# Altium PCB Power Distribution Board.PcbDoc
Units mil, origin at the board's own origin, x right, y up, seen from the top; angles counter-clockwise.
Board outline 3000 x 2000 mil, 2 copper layers (Top Layer, Bottom Layer); 28 components, 15 nets, 78 pads, 13 vias.
Unrouted connection lines stored in the file: 1.
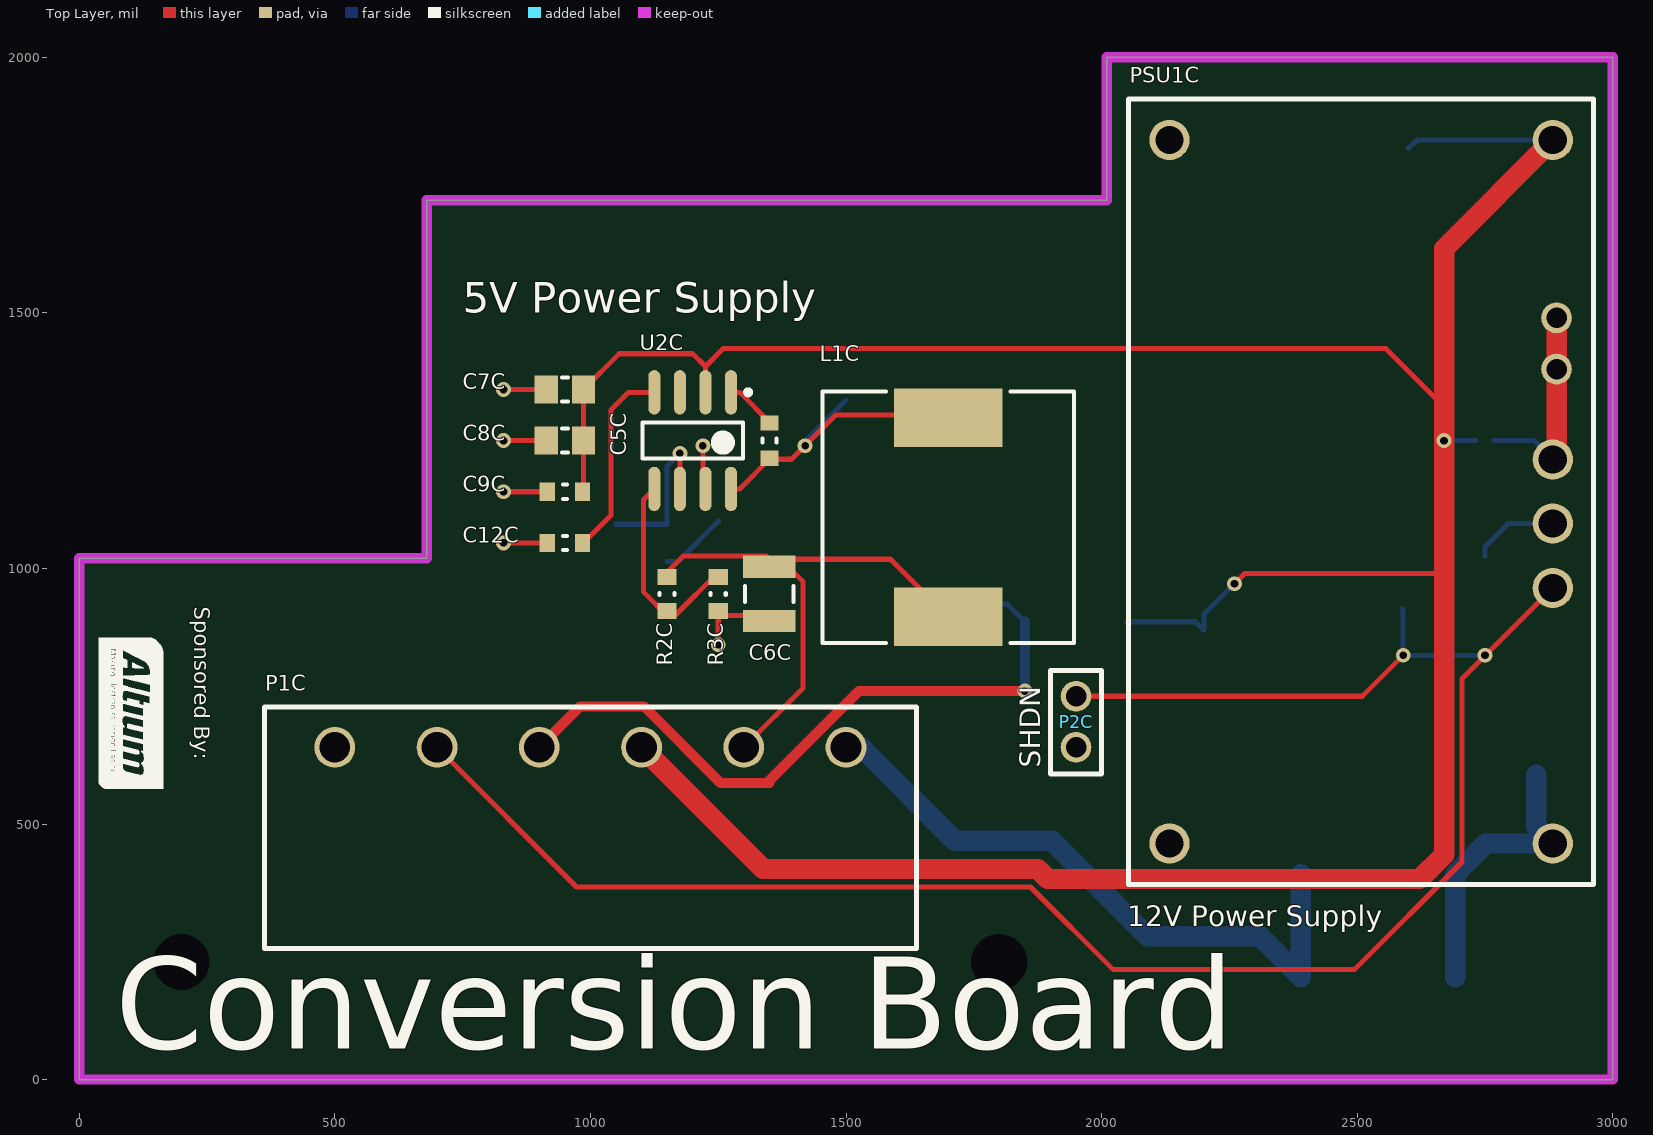
[diagram p0: Top Layer view]
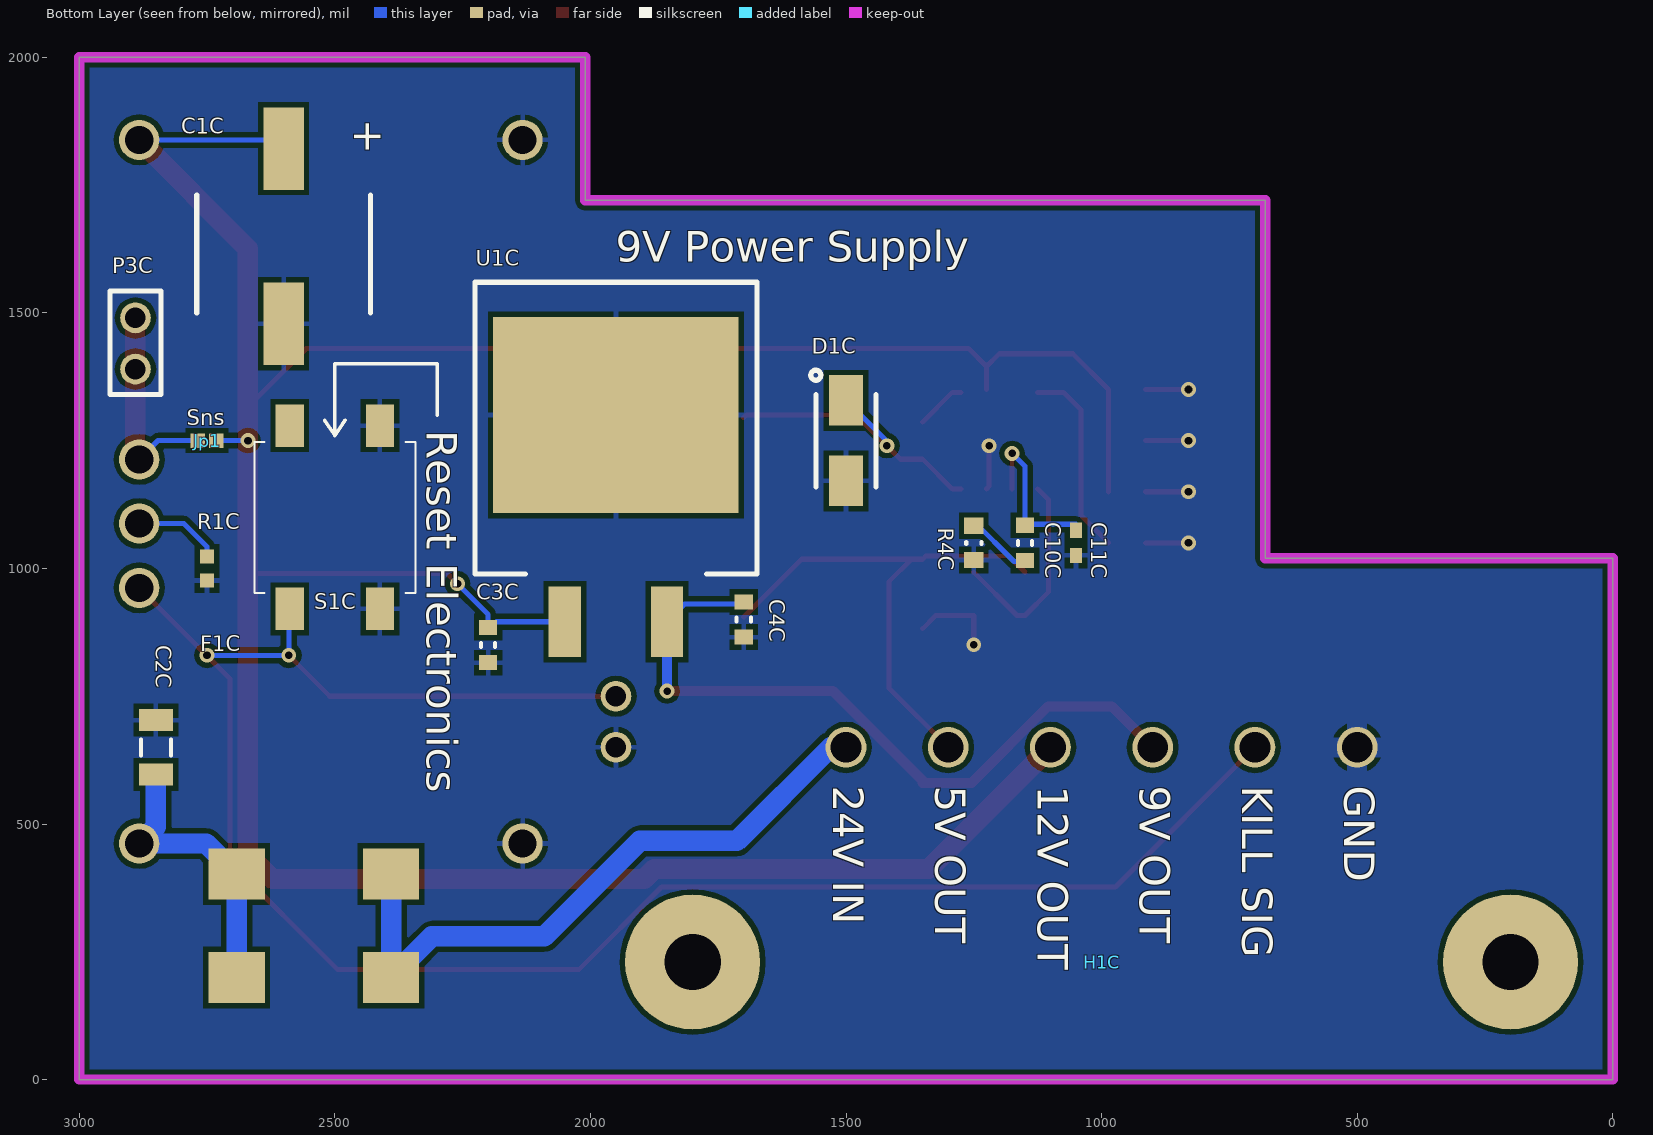
[diagram p1: Bottom Layer view, seen from below]

## Layer stack, top to bottom
Top Solder: solder mask 0.4, Solder Resist, Dk 3.5
Top Layer: signal copper 1.4
Dielectric 1: dielectric 12.6, FR-4, Dk 4.8
Bottom Layer: signal copper 1.4
Bottom Solder: solder mask 0.4, Solder Resist, Dk 3.5

## Board outline
0,0 3000,0 3000,2000 2010,2000 2010,1720 680,1720 680,1020 0,1020

## Design rules (kind name [scope] priority, off if disabled: settings)
Clearance "Ignore Jumper Clearance 1" [InComponent('Jp1')] p1: gap=10 ignorepadtopadclearanceinfootprint=FALSE except(0: Arc-Hole Track-Hole SMDPad-Hole THPad-Hole Via-Hole Fill-Hole Poly-Hole Region-Hole Text-Hole; 6: SMDPad-SMDPad)
Clearance [All] p2: gap=10 ignorepadtopadclearanceinfootprint=FALSE except(0: Arc-Hole Track-Hole SMDPad-Hole THPad-Hole Via-Hole Fill-Hole Poly-Hole Region-Hole Text-Hole)
HoleSize [All] p1: absolutevalues=TRUE maxlimit=110 minlimit=15 maxpercent=80.000 minpercent=20.000
MinimumSolderMaskSliver [All] p1: minsoldermaskwidth=0
PolygonConnect "Augment Gnd On Main Connector" [(InNet('GND') AND InComponent('P1C'))] p1: connectstyle=Relief reliefconductorwidth=40 reliefentries=4 polygonreliefangle="90 Angle" airgapwidth=10
PolygonConnect ViaConnect [IsVia] p2: connectstyle=Direct reliefconductorwidth=10 reliefentries=4 polygonreliefangle="90 Angle" airgapwidth=10
PolygonConnect [All] p3: connectstyle=Relief reliefconductorwidth=10 reliefentries=4 polygonreliefangle="90 Angle" airgapwidth=10
RoomDefinition "U_Power Distribution" [InComponentClass('U_Power Distribution')] p1: confinementstyle=ConfineIn formatcopy=TRUE lockcomponents=FALSE outline 7.68,100 3007.68,100 3007.68,2150 7.68,2150
RoutingVias [All] p1: holewidth=28 width=50 viastyle="Through Hole" minholewidth=4 minwidth=18 maxholewidth=28 maxwidth=50
SilkToSolderMaskClearance [IsPad] p1: minsilkscreentomaskgap=0 clearancetoexposedcopper=FALSE
SolderMaskExpansion "Cover All Vias" [IsVia] p1: expansion=-50
SolderMaskExpansion [All] p2: expansion=4
Width [All] p1: maxlimit=100 minlimit=10 preferedwidth=10
27 further rules are at their usual default settings.

## Classes and differential pairs
component class "Power Distribution Board": F1C H1C P1C
component class "U_Power Distribution": C1C C2C C3C C4C C5C C6C C7C C8C C9C C10C C11C C12C D1C Jp1 L1C P2C P3C PSU1C R1C R2C R3C R4C S1C U1C U2C

## Components (designator, comment, footprint, x,y, rotation, side; value= is the part's Value field where it differs from the comment)
C1C "Panasonic 330uF, Radial Can" EEE-FP1C331AP 2600,1650 r90 bottom
C2C "2.2uF, C1206 TY , Ceramic MLCC" C1206 2850,650 r90 bottom
C3C "0.1uF, C0603, MultiComp" C0603 2200,850 r270 bottom
C4C "0.1uF, C0603, MultiComp" C0603 1700,900 r270 bottom
C5C "0.1uF, C0603, MultiComp" C0603 1350,1250 r90 top
C6C "33uF, 6.3V, C1210, TDK" C1210 1350,950 r270 top
C7C "4.7uF, C0805, Multicomp" C0805 950,1350 r180 top
C8C "4.7uF, C0805, Multicomp" C0805 950,1250 r180 top
C9C "0.01uF, C0603, AVX" C0603 950,1150 r180 top
C10C "1800pF, 50V, C0603, Multicomp" C0603 1150,1050 r270 bottom
C11C "47pF, 50V, C0402, Yageo" C0402 1050,1050 r270 bottom
C12C "0.01uF, C0603, AVX" C0603 950,1050 r180 top
D1C "Shottky" SCHOTTKY-B220/A 1500,1250 r270 bottom
F1C "3569TR" "Horizontal SMD fuse clip" 2390,200 r0 bottom
H1C "Holes - x inch" "110mil Holes - 1.6 Inch" 1000,230 r180 top
Jp1 "Jumper" "Jumper (optional) SMD" 2750,1250 r180 bottom
L1C "18.0 µH" "WE-PD 1245" 1700,1100 r270 top
P1C "MSTBA 2,5/ 6-G-5,08" "MSTBA 2,5 6-G-5,08" 500,650 r0 top
P2C "Header" "1x2 Header" 1950,700 r270 top
P3C "Header" "1x2 Header" 2890,1440 r90 bottom
PSU1C "PTN78020W" PTN78020 2507.68,1150 r90 top
R1C "Resistor" R0402 2750,1000 r270 bottom
R2C "Resistor" R0603 1150,950 r90 top
R3C "Resistor" R0603 1250,950 r90 top
R4C "Resistor" R0603 1250,1050 r90 bottom
S1C "FSM2JSMA" FSM2JSMA 2500,1100 r0 bottom
U1C "L7809" L7809CD2T-D2PAK 1950,1300 r180 bottom
U2C "TPS54231" TPS54231-SOIC8 1200,1250 r270 top

## Footprints (in the part's own frame and the unit in brackets; to place one, negate y for a bottom-side part, rotate by r counter-clockwise, add the part's x,y. Pads: shape width x height; smd on the part's side, far side on the other; paste and mask are expansions set on the pad)
"1x2 Header" [mil]
  round 60 hole 40: 1(-50,0) 2(50,0)
  silkscreen extent -100,-50 102,50, body extent -100,-50 100,50, height 374
"110mil Holes - 1.6 Inch" [mil]
  round 0 hole 110: 0(-800,0) 0(800,0)
  round 264 smd far side: 0(-800,0) 0(800,0)
C0402 [mm] "Chip Capacitor, 2-Leads, Body 1.0x0.5mm, IPC Medium Density"
  rect 0.75x0.6 smd: 1(-0.625,0) 2(0.625,0)
  body extent -0.5,-0.25 0.5,0.25, height 0.5
C0603 [mm] "Chip Capacitor, 2-Leads, Body 1.6x0.8mm, IPC Medium Density"
  rect 0.75x0.9 smd: 1(-0.875,0) 2(0.875,0)
  silkscreen extent -0.1,-0.35 0.1,0.35, body extent -0.8,-0.4 0.8,0.4, height 0.6
C0805 [mm] "Chip Capacitor, 2-Leads, Body 2.0x1.3mm, IPC Medium Density"
  rect 1.15x1.4 smd: 1(-0.925,0) 2(0.925,0)
  silkscreen extent -0.15,-0.6 0.15,0.6, body extent -1,-0.63 1,0.63, height 0.6
C1206 [mm] "Chip Capacitor, Body 3.2x1.6mm, IPC High Density"
  rect 1.1x1.7 smd: 1(-1.35,0) 2(1.35,0)
  silkscreen extent -0.4,-0.75 0.4,0.75, body extent -1.7,-0.9 1.7,0.9, height 1.3
C1210 [mm] "Chip Capacitor, Body 3.2x2.5mm, IPC High Density"
  rect 1.1x2.6 smd: 1(-1.35,0) 2(1.35,0)
  silkscreen extent -0.4,-1.2 0.4,1.2, body extent -1.7,-1.35 1.7,1.35, height 1.3
EEE-FP1C331AP [mm] "8mm Radial Can, Aluminum, Panasonic, 330uF, 16V"
  rect 4.1x2 smd: 1(4.35,0) 2(-4.35,0)
  silkscreen extent -3.81,-4.32 2.03,4.32, body extent -4.95,-4.15 4.95,4.15, height 10.2
FSM2JSMA [mm] "SPST OFF-MOM Switch"
  rect 1.4x2.1 smd: 1(2.24,4.55) 2(2.24,-4.55) 3(-2.24,4.55) 4(-2.24,-4.55)
  silkscreen extent -4,-3.75 4,3.75, body extent -3,-5 3,5, height 4.28
"Horizontal SMD fuse clip" [mil] "Fuse clip assembly for automotive fuses"
  rect 110x100 smd: 1(0,-202) 1(0,0) 2(302,-202) 2(302,0)
  body extent -78,-611 380,53, height 150
"Jumper (optional) SMD" [mil] "A solder pad based (optional) Jumper"
  rect 28x28 smd: 1(-18,0) 2(18,0)
L7809CD2T-D2PAK [mm] "9V Regulator, D2PAK"
  rect 12.2x9.75 smd: GND(0,0)
  rect 1.6x3.5 smd: INPUT(-2.54,-10.27) OUTPUT(2.54,-10.27)
  silkscreen extent -7,-7.9 7,6.6, body extent -4.91,-10.97 4.91,3.64, height 4.22
"MSTBA 2,5 6-G-5,08" [mm] "Header, Male, 6 Pin, 90deg"
  round 2.03 hole 1.53: 1(0,0) 2(5.08,0) 3(10.16,0) 4(15.24,0) 5(20.32,0) 6(25.4,0)
  silkscreen extent -3.5,-10 28.9,2, body extent -3.52,-10 28.95,2, height 8.6
PTN78020 [mm] "DC-DC Non-isolating converter"
  round 2 hole 1.4: 1(-17.48,9.525) 2(-17.48,-9.525) 3(-4.78,-9.525) 4(-1.58,-9.525) 5(1.6,-9.525) 6(17.48,-9.525) 7(17.48,9.525)
  silkscreen extent -19.51,-11.56 19.51,11.56, body extent -19.58,-11.63 19.41,11.56, height 5.08
R0402 [mm] "Chip Resistor, 2-Leads, Body 1.0x0.5mm, IPC Medium Density"
  rect 0.7x0.7 smd: 1(-0.6,0) 2(0.6,0)
  body extent -0.5,-0.25 0.5,0.25, height 0.3
R0603 [mm] "Chip Resistor, 2-Leads, Body 1.5x0.8mm, IPC Medium Density"
  rect 0.8x0.95 smd: 1(-0.85,0) 2(0.85,0)
  silkscreen extent -0.05,-0.38 0.05,0.38, body extent -0.77,-0.4 0.77,0.4, height 0.45
SCHOTTKY-B220/A [mm] "Schotty Diode"
  rect 2.5x1.7 smd: 1(-2,0) 2(2,0)
  silkscreen extent -3.5,-1.75 2.3,1.5, body extent -2.29,-1.46 2.28,1.46, height 2.41
TPS54231-SOIC8 [mm] "SOIC, 8-Leads, Body 5.0x4.0mm (max), Pitch 1.27mm, IPC Medium Density"
  oval 2.2x0.6 smd: BOOT(-2.4,1.905) COMP(2.4,-0.635) EN(-2.4,-0.635) GND(2.4,0.635) PH(2.4,1.905) SS(-2.4,-1.905) VIN(-2.4,0.635) VSENSE(2.4,-1.905)
  silkscreen extent -2.52,-2.5 0.9,2.88, body extent -2,-2.5 2,2.5, height 1.75
"WE-PD 1245" [mm] "SMD Inductor, 2-Leads, Body 12,0x12,0mm"
  rect 2.9x5.4 smd: 1(-4.95,0) 2(4.95,0)
  silkscreen extent -6.25,-6.25 6.25,6.25, body extent -6,-6 6,6, height 4.49

## Part data
C1C: "Aluminum Radial Can, Panasonic, 330uF, 16V, SMD"
C2C: "Ceramic MLCC, Taiyo Yuden, X7R Dielectric"
C3C C4C C5C: "Ceramic MLCC, Multicompo, X7R Dielectric"
C6C: "Ceramic MLCC, TDK, X5R Dielectric"
C7C C8C: "Ceramic MLCC, Multicomp, X5R Dielectric"
C9C C12C: "Ceramic MLCC, AVX, X7R Dielectric"
C10C: "Ceramic MLCC, Multicomp, X7R Dielectric"
C11C: "Ceramic MLCC, Yageo, C0G/NP0 Dielectric"
D1C: library part Schottky
F1C: "Fuse Clip Assembly"
Jp1: library part "Jump Optional", "Resistor"
L1C: library part "WE-PD 1245, LS, 7447715180", "SMD-Shielded Power Inductor WE-PD, L=18.0 µH"
P1C: "Header, 6-Pin"
P2C P3C: library part "1x2 Header", "1x2 Header"
PSU1C: "Adjustable, non-isolating DC-DC converter"
R1C: library part "732, 1%, 100mW, Panasonic, R0402"
R2C: library part "10.5K, 1%, 63mW, Multicomp, R0603"
R3C: library part "2k, 1%, 100mW, Yageo, R0603"
R4C: library part "21K, 1%, 100mW, Vishay, R0603"
S1C: "Tactile Switch (OFF-MOM)"
U2C: "2A Switching Regulator"

## Via types
v1: diameter 29, hole 15, Top Layer to Bottom Layer, 13 vias

## Nets (pads, with @x,y where several pads share a name; then routed paths per layer and width w, separated by ;. In a path a pad name is that pad's centre, name@x,y a point inside that pad or via, vN(x,y) a via of type N, cw(c..) or ccw(c..) an arc to the next point about the centre after c; other vN are vias at no path point)
5V_OUT: C6C.1 L1C.2 P1C.5 R2C.2 | length 1068.8
  Top Layer w10: R2C.2@1150,992.32 1181.73,1024.06 1343.86,1024.06 C6C.1@1350,1017.91 ; P1C.5 1416.18,766.18 1416.18,973.82 1372.09,1017.91 C6C.1@1350,1017.91 ; L1C.2 1587.2,1017.91 C6C.1@1350,1017.91
9V_OUT: C4C.1 P1C.3 U1C.OUTPUT | length 1422.1
  Top Layer w20: P1C.3 980,730 1104.8,730 1254.8,580 1350,580 1350,584.8 1525.2,760 v1(1850,760)
  Bottom Layer w10: C4C.1@1700.47,930 1815.67,930 U1C.OUTPUT
  Bottom Layer w20: v1(1850,760) U1C.OUTPUT
12V_OUT: C1C.1 C3C.1 C7C.1 C8C.1 C9C.1 Jp1.2 P1C.4 PSU1C.6 U1C.INPUT U2C.VIN | length 6282.6
  Top Layer w10: C9C.1@986.42,1150 C8C.1 C7C.1 1056.42,1420 1200,1420 1225,1395 ; U2C.VIN@1225,1350 1225,1395 ; U2C.VIN@1225,1363.9 1225,1395 ; v1(2260,970) 2280,990 2670,990 ; 2667.99,1317.99 2555.98,1430 1260,1430 1225,1395
  Top Layer w40: P1C.4 1338,412 1875.39,412 1894.95,392.44 2622.44,392.44 2670,440 2670,990 2670,1625.51 PSU1C.6
  Bottom Layer w10: U1C.INPUT 2183.86,895.67 2200,879.53 2200,910 v1(2260,970) ; C1C.1 2616.93,1838.19 PSU1C.6 ; v1(2670,1250) Jp1.2
GND: C1C.2 C2C.2 C3C.2 C4C.2 C6C.2 C7C.2 C8C.2 C9C.2 C11C.2 C12C.2 D1C.2 P1C.1 P2C.2 PSU1C.1 PSU1C.7 R1C.2 R3C.1 R4C.1 S1C.3 S1C.4 U1C.GND U2C.GND | length 588.3
  Top Layer w10: v1(830,1050) C12C.2@913.58,1050 ; v1(830,1150) C9C.2@913.58,1150 ; v1(830,1250) C8C.2 ; v1(830,1350) C7C.2 ; v1(1220,1240) 1220,1160.51 U2C.GND ; v1(1250,850.83) 1250,907.68 1324.41,907.68 C6C.2@1350,882.09
"LINE SENSE": Jp1.1 P3C.1 P3C.2 PSU1C.5 | length 410
  Top Layer w40: PSU1C.5 2890,1220.32 P3C.1 P3C.2
  Bottom Layer w10: Jp1.1 2845.67,1250 PSU1C.5
NetC2C_1: C2C.1 F1C.2 PSU1C.2 | length 566
  Bottom Layer w40: F1C.2@2692,200 2692,402 2751.81,461.81 PSU1C.2 2850,494.49 C2C.1
NetC5C_1: C5C.1 D1C.1 L1C.1 U2C.PH | length 608.8
  Top Layer w10: U2C.PH 1291.93,1155.51 1350,1213.58 1393.58,1213.58 v1(1420,1240) 1480,1300 1694.88,1300 L1C.1
  Bottom Layer w10: v1(1420,1240) 1420,1248.74 D1C.1
NetC5C_2: C5C.2 U2C.BOOT | length 99.1
  Top Layer w10: U2C.BOOT 1291.93,1344.49 C5C.2@1350,1286.42
NetC10C_1: C10C.1 C11C.1 U2C.COMP | length 318.4
  Top Layer w10: U2C.COMP v1(1175,1225)
  Bottom Layer w10: C11C.1@1050,1086.42 1150,1086.42 1150,1200 v1(1175,1225)
NetC10C_2: C10C.2 R4C.2 | length 132.6
  Bottom Layer w10: C10C.2@1150,1013.58 1171.26,1013.58 R4C.2@1250,1092.32
NetC12C_1: C12C.1 U2C.SS | length 381.5
  Top Layer w10: C12C.1@986.42,1050 1040,1103.58 1040,1310 1074.49,1344.49 U2C.SS
NetF1C_1: F1C.1 P1C.6 | length 1278.4
  Bottom Layer w40: P1C.6 1530,650 1713.19,466.81 1903.19,466.81 2090,280 2310,280 2390,200 F1C.1@2390,402
NetPSU1C_4: PSU1C.4 R1C.1 | length 170.2
  Bottom Layer w10: R1C.1 2750,1042.32 2795.47,1087.8 PSU1C.4
NetR2C_1: R2C.1 R3C.2 U2C.VSENSE | length 411.1
  Top Layer w10: U2C.VSENSE 1103.5,1134.02 1103.5,954.17 1150,907.68 1165.35,907.68 R3C.2@1250,992.32
SHDN_IN: P1C.2 P2C.1 PSU1C.3 S1C.1 S1C.2 | length 3807
  Top Layer w10: P1C.2 973,377 1860.89,377 2022.89,215 2494.5,215 2705,425.5 2705,784.13 PSU1C.3 ; P2C.1 2510,750 v1(2590,830)
  Bottom Layer w10: S1C.1 2590,919.06 v1(2590,830) v1(2750,830)
pads on no net: H1C.0 U2C.EN

## Polygon pours and split planes (outlines as drawn)
GND on Bottom Layer "Ground Plane" (solid, pour order 0): 680,1020 0,1020 0,0 3000,0 3000,2000 2010,2000 2010,1720 680,1720

## Keep-outs
Keep-Out Layer:
  the board outline again, w20

## Silkscreen, mask and mechanical layers (free items; w line width, h text height)
Top Overlay:
  drawing of 878 lines, arcs and shapes, not listed
  text "3.0 x 2.0 inch" at 1090,2120 h180
  text "5V Power Supply" at 750,1500 h60
  text "Sponsored By:" at 225,925 h30 r270
  text "SHDN" at 1880,610 h40 r90
  text "12V Power Supply" at 2050,300 h40
  text "Conversion Board" at 70,60 h180
Bottom Overlay:
  lines w7: 2300,1300 2300,1400 2500,1400 2500,1260 ; 2480,1290 2500,1260 ; 2520,1290 2500,1260
  text "9V Power Supply" at 1950,1600 h60
  text "Sns" at 2790,1280 h30
  text "Reset Electronics" at 2320,1270 h60 r90
  text "GND" at 525,575 h60 r90
  text "KILL SIG" at 725,575 h60 r90
  text "9V OUT" at 925,575 h60 r90
  text "12V OUT" at 1125,575 h60 r90
  text "5V OUT" at 1325,575 h60 r90
  text "24V IN" at 1525,575 h60 r90

## Text inside footprints (layer, text, board x,y; h text height)
C1C: Bottom Overlay "+" at 2410,1810 h60 r270